# Altium PCB 34_14R.PcbDoc
Units mm, origin at the board's own origin, x right, y up, seen from the top; angles counter-clockwise.
Board outline 152.4 x 101.6 mm, 2 copper layers (Top Layer, Bottom Layer); 10 components, 25 nets, 70 pads, 4 vias.
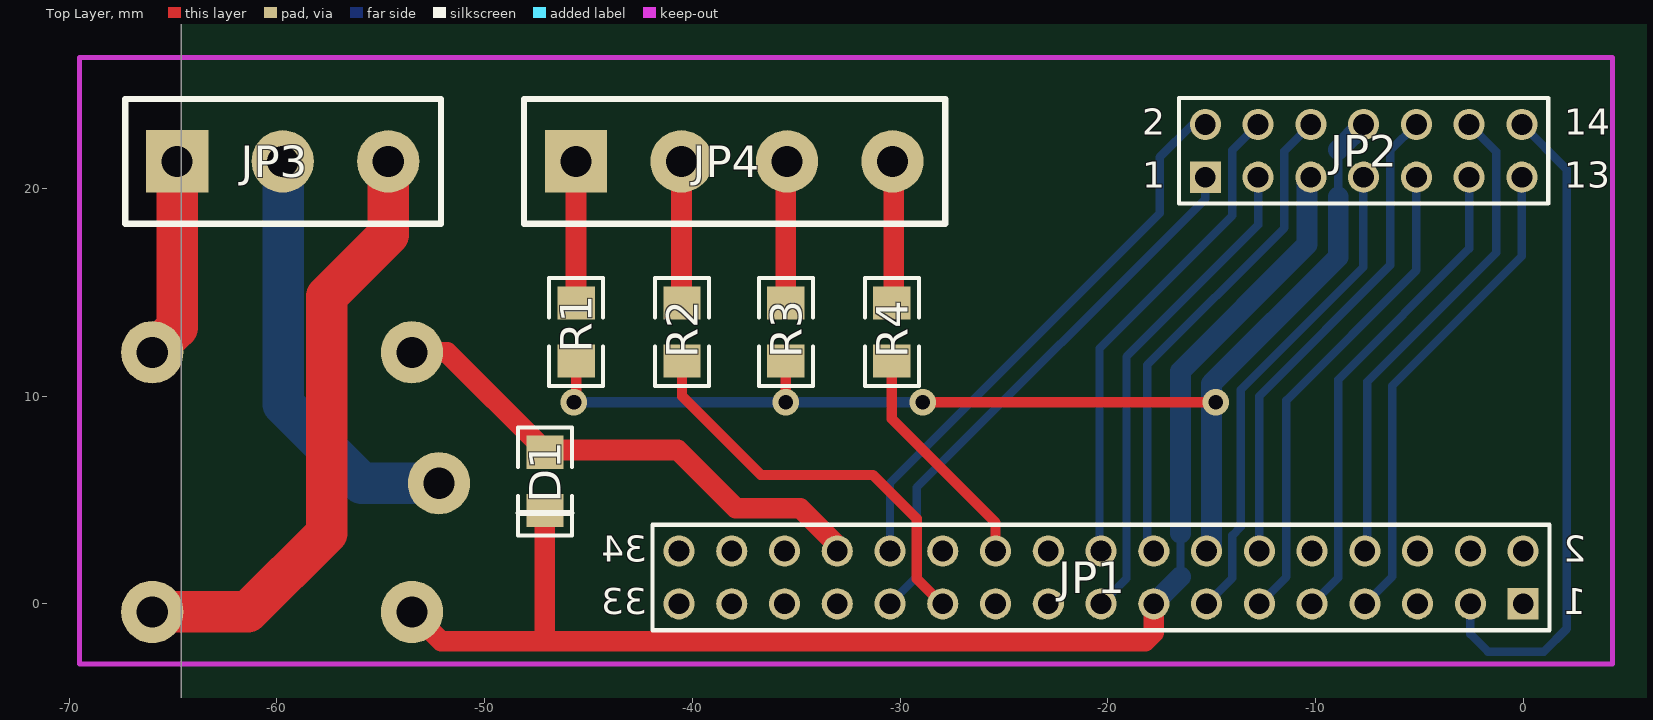
[diagram p0: Top Layer view]
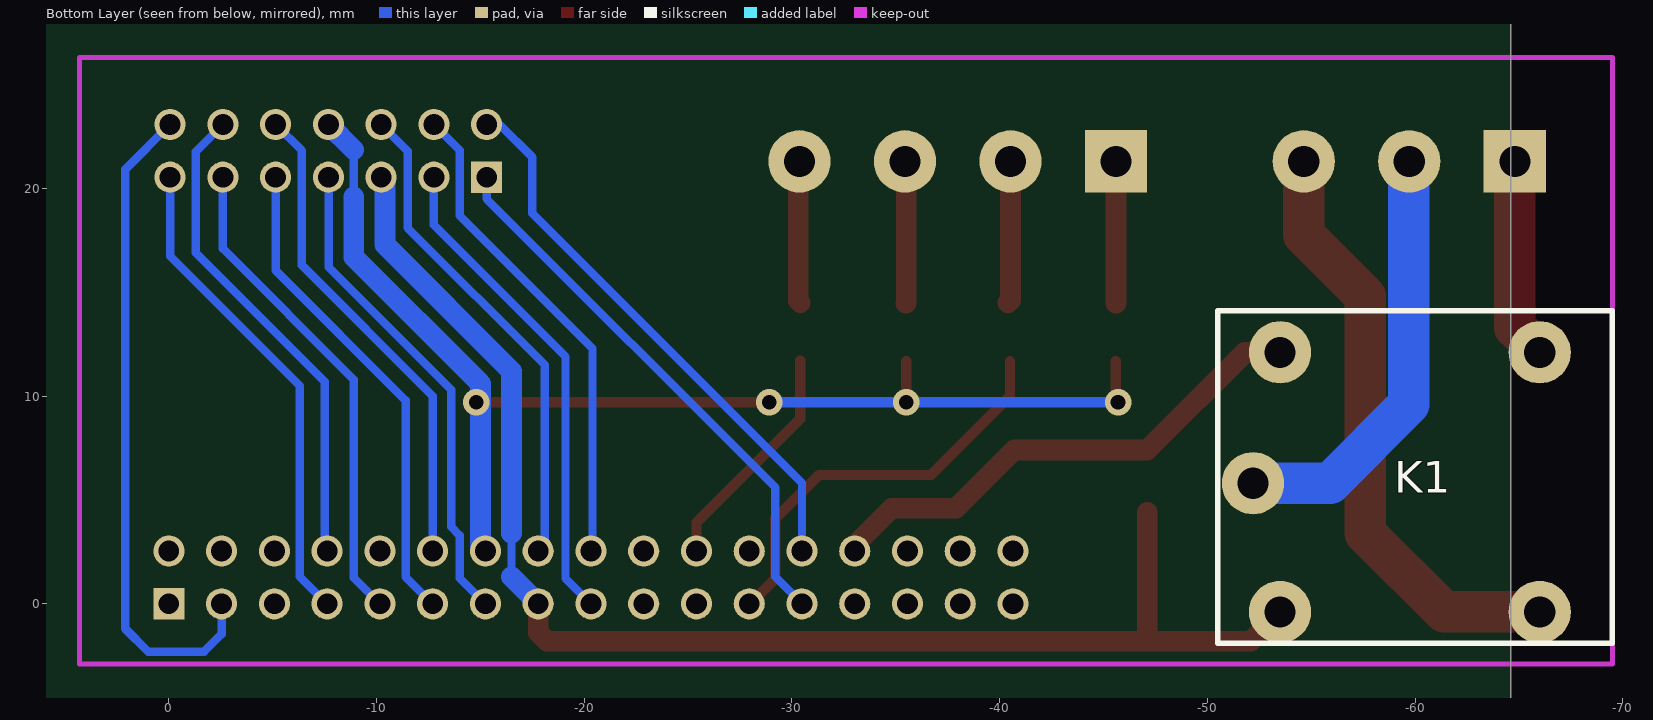
[diagram p1: Bottom Layer view, seen from below]

## Layer stack, top to bottom
Top Layer: signal copper 0.0356
Dielectric: dielectric 0.32, FR-4, Dk 4.8
Bottom Layer: signal copper 0.0356

## Board outline
-64.6,-29.6 87.8,-29.6 87.8,72 -64.6,72

## Design rules (kind name [scope] priority, off if disabled: settings)
Clearance [All] p1: gap=0.254
ComponentClearance [All] p1: gap=0.254 collisioncheckmode=0
PolygonConnect [All] p1: connectstyle=Relief reliefconductorwidth=0.254 reliefentries=4 polygonreliefangle="90 Angle"
RoutingLayers [All] p1: top layer=Horizontal bottom layer=Vertical
RoutingVias [All] p1: holewidth=0.711 width=1.27 viastyle="Through Hole" minholewidth=0.711 minwidth=1.27 maxholewidth=0.711 maxwidth=1.27
SolderMaskExpansion [All] p1: expansion=0.102
TestPointUsage [All] p1: valid=0 allowmultiple=FALSE
Testpoint [All] p1: side=15 testpointundercomponent=TRUE minsize=1.016 maxsize=2.54 preferedsize=1.524 minholesize=0 maxholesize=1.016 preferedholesize=0.813 testpointgrid=0.025 style=1023 order=1234567890
Width [All] p1: maxlimit=3 minlimit=0.254 preferedwidth=0.254 toplayer_prefwidth=0.5 bottomlayer_prefwidth=0.5 minimp=50.000000 maximp=50.000000 favimp=50.000000
16 further rules are at their usual default settings.

## Components (designator, comment, footprint, x,y, rotation, side; value= is the part's Value field where it differs from the comment)
D1 "LL4148" _1206d -47.1,5.9 r90 top
JP1 "MHDR2X17" HDR2X17 0,0 r180 top
JP2 "MHDR2X7" HDR2X7 -15.3,20.54 r0 top
JP3 "Header 3" 2EDG-5.08-3P -64.8,21.3 r0 top
JP4 "Header 4" "2EDG-5.08-4P - duplicate" -45.6,21.3 r0 top
K1 "BS115" bs115 -53.5,12.1 r270 bottom
R1 "K51" _1206 -45.6,13.1 r90 top
R2 "K51" _1206 -40.5,13.1 r90 top
R3 "K51" _1206 -35.5,13.1 r90 top
R4 "K51" _1206 -30.4,13.1 r90 top

## Footprints (in the part's own frame and the unit in brackets; to place one, negate y for a bottom-side part, rotate by r counter-clockwise, add the part's x,y. Pads: shape width x height; smd on the part's side, far side on the other; paste and mask are expansions set on the pad)
2EDG-5.08-3P [mm]
  rect 3x3 hole 1.5: 1(0,0)
  round 3 hole 1.5: 2(5.08,0) 3(10.16,0)
  silkscreen extent -2.5,-3 12.7,3
"2EDG-5.08-4P - duplicate" [mm]
  rect 3x3 hole 1.5: 1(0,0)
  round 3 hole 1.5: 2(5.08,0) 3(10.16,0) 4(15.24,0)
  silkscreen extent -2.5,-3 17.78,3
_1206 [mm]
  rect 1.6x1.8 smd: 1(-1.412,-0.007) 2(1.388,-0.007)
  silkscreen extent -2.61,-1.31 2.59,1.29
_1206d [mm]
  rect 1.6x1.8 smd: 1(1.395,-0.009) 2(-1.405,-0.009)
  silkscreen extent -2.6,-1.31 2.6,1.29
bs115 [mm]
  round 3 hole 1.5: 1(6.292,-1.304) 2(-0.008,12.496) 3(12.492,12.496) 4(-0.008,-0.004) 5(12.492,-0.004)
  silkscreen extent -2.01,-3 13.99,16
HDR2X7 [mm]
  rect 1.5x1.5 hole 1: 1(0,0)
  round 1.5 hole 1: 2(0,2.54) 3(2.54,0) 4(2.54,2.54) 5(5.08,0) 6(5.08,2.54) 7(7.62,0) 8(7.62,2.54) 9(10.16,0) 10(10.16,2.54) 11(12.7,0) 12(12.7,2.54) 13(15.24,0) 14(15.24,2.54)
  silkscreen extent -1.27,-1.27 16.51,3.81
HDR2X17 [mm]
  rect 1.5x1.5 hole 1: 1(0,0)
  round 1.5 hole 1: 2(0,-2.54) 3(2.54,0) 4(2.54,-2.54) 5(5.08,0) 6(5.08,-2.54) 7(7.62,0) 8(7.62,-2.54) 9(10.16,0) 10(10.16,-2.54) 11(12.7,0) 12(12.7,-2.54) 13(15.24,0) 14(15.24,-2.54) 15(17.78,0) 16(17.78,-2.54) 17(20.32,0) 18(20.32,-2.54) 19(22.86,0) 20(22.86,-2.54) 21(25.4,0) 22(25.4,-2.54) 23(27.94,0) 24(27.94,-2.54) 25(30.48,0) 26(30.48,-2.54) 27(33.02,0) 28(33.02,-2.54) 29(35.56,0) 30(35.56,-2.54) 31(38.1,0) 32(38.1,-2.54) 33(40.64,0) 34(40.64,-2.54)
  silkscreen extent -1.27,-3.81 41.91,1.27

## Part data
D1: library part Diode, "Diode"
JP1: "Header, 17-Pin, Dual row"
JP2: "Header, 7-Pin, Dual row"
JP3: library part MHDR1X2, "Header, 2-Pin"
JP4: "Header, 4-Pin"
K1: "Single-Pole Dual-Throw Relay"
R1 R2 R3 R4: library part Res2, "Resistor"

## Via types
v1: diameter 1.27, hole 0.711, Top Layer to Bottom Layer, 4 vias

## Nets (pads, with @x,y where several pads share a name; then routed paths per layer and width w, separated by ;. In a path a pad name is that pad's centre, name@x,y a point inside that pad or via, vN(x,y) a via of type N, cw(c..) or ccw(c..) an arc to the next point about the centre after c; other vN are vias at no path point)
NetD1_1: D1.1 JP1.28 K1.4 | length 24.6
  Top Layer w1: K1.4 -51.808,12.108 -47.2,7.5 -47.1,7.4 -40.7,7.4 -37.9,4.6 -34.8,4.6 -33.02,2.82 JP1.28
NetD1_2: D1.2 JP1.15 JP2.5 K1.5 | length 67.8
  Top Layer w1: K1.5 -52.088,-1.8 -18.2,-1.8 -17.78,-1.38 JP1.15 ; -47.1,-1.8 D1.2@-47.1,4.4
  Bottom Layer w0.4: JP1.15@-17.8,0 JP1.15@-17.79,0.01 ; -16.5,1.3 -16.5,3.4
  Bottom Layer w1: JP1.15@-17.8,0 -16.5,1.3 ; JP1.15 JP1.15@-17.78,0.02 ; -16.5,3.4 -16.5,11.2 -10.4,17.3 -10.4,20.36 JP2.5
NetJP1_3: JP1.3 JP2.14 | length 32.1
  Bottom Layer w0.4: JP1.3 -2.54,-1.46 -1.7,-2.3 1,-2.3 2.1,-1.2 2.1,20.92 JP2.14
NetJP1_7: JP1.7 JP2.13 | length 23.7
  Bottom Layer w0.4: JP1.7 -6.3,1.32 -6.3,10.5 -0.06,16.74 JP2.13
NetJP1_8: JP1.8 JP2.12 | length 23.7
  Bottom Layer w0.4: JP1.8@-7.6,2.5 -7.5,2.6 -7.5,10.7 -1.3,16.9 -1.3,21.78 JP2.12
NetJP1_9: JP1.9 JP2.11 | length 23.7
  Bottom Layer w0.4: JP1.9 -8.9,1.26 -8.9,10.8 -2.6,17.1 JP2.11
NetJP1_10: JP1.10
NetJP1_11: JP1.11 JP2.9 | length 23.7
  Bottom Layer w0.4: JP1.11 -11.4,1.3 -11.4,9.8 -5.14,16.06 JP2.9
NetJP1_12: JP1.12 JP2.10 | length 23.7
  Bottom Layer w0.4: JP1.12 -12.7,10 -6.4,16.3 -6.4,21.82 JP2.10
NetJP1_13: JP1.13 JP2.7 | length 23.7
  Bottom Layer w0.4: JP1.13 -14,1.24 -14,3.3 -13.6,3.7 -13.6,10.3 -7.7,16.2 JP2.7@-7.7,20.5 ; JP2.7@-7.68,20.5 JP2.7
NetJP1_14: JP1.14 JP2.8 R1.1 R3.1 | length 58.8
  Top Layer w0.5: v1(-45.7,9.7) -45.593,9.807 R1.1 ; v1(-35.5,9.7) -35.493,9.707 R3.1 ; v1(-28.9,9.7) v1(-14.8,9.7)
  Bottom Layer w0.4: -8.9,19.6 -8.9,21.86
  Bottom Layer w0.5: v1(-45.7,9.7) v1(-28.9,9.7)
  Bottom Layer w1: JP1.14 -15,2.78 -15,10.6 -8.9,16.7 -8.9,19.6 ; v1@-15,9.7 v1(-14.8,9.7) ; -8.9,21.86 JP2.8
NetJP1_16: JP1.16 JP2.6 | length 23.9
  Bottom Layer w0.4: JP1.16 -18.1,2.86 -18.1,11.5 -11.5,18.1 -11.5,21.8 JP2.6
NetJP1_17: JP1.17 JP2.3 | length 23.8
  Bottom Layer w0.4: JP1.17@-20.4,0 JP1.17 -19.1,1.22 -19.1,11.9 -12.76,18.24 JP2.3
NetJP1_18: JP1.18 JP2.4 | length 23.7
  Bottom Layer w0.4: JP1.18@-20.4,2.5 -20.4,12.3 -14,18.7 -14,21.84 JP2.4
NetJP1_22: JP1.22 R4.1 | length 11.2
  Top Layer w0.5: R4.1@-30.4,11.7 -30.4,8.9 -25.4,3.9 JP1.22
NetJP1_23: JP1.23 R2.1 | length 20
  Top Layer w0.5: R2.1 -40.493,9.993 -36.704,6.204 -31.304,6.204 -29.2,4.1 -29.2,1.2 JP1.23@-28,0
NetJP1_25: JP1.25 JP2.1 | length 26.8
  Bottom Layer w0.4: JP1.25@-30.5,0 -29.2,1.3 -29.2,5.6 -15.3,19.5 JP2.1
NetJP1_26: JP1.26 JP2.2 | length 27.2
  Bottom Layer w0.4: JP1.26 -30.48,5.82 -17.5,18.8 -17.5,21.5 -15.92,23.08 JP2.2 JP2.2@-15.3,23.1
NetJP3_1: JP3.1 K1.2 | length 9.8
  Top Layer w2: K1.2 -64.8,13.304 JP3.1@-64.8,21.4
NetJP3_2: JP3.2 K1.1 | length 20.7
  Bottom Layer w2: JP3.2@-59.7,21.2 -59.7,9.6 -55.908,5.808 K1.1
NetJP3_3: JP3.3 K1.3 | length 29.1
  Top Layer w2: K1.3 -61.392,-0.392 -57.6,3.4 -57.6,14.8 -54.64,17.76 JP3.3
NetJP4_1: JP4.1 R1.2 | length 6.8
  Top Layer w1: JP4.1 -45.6,14.494 R1.2
NetJP4_2: JP4.2 R2.2 | length 6.8
  Top Layer w1: JP4.2 -40.52,14.62 -40.441,14.541 R2.2@-40.4,14.5
NetJP4_3: JP4.3 R3.2 | length 6.8
  Top Layer w1: JP4.3@-35.5,21.3 -35.5,14.494 R3.2
NetJP4_4: JP4.4 R4.2 | length 6.8
  Top Layer w1: R4.2@-30.4,14.5 -30.3,14.6 JP4.4@-30.3,21.3
pads on no net: JP1.1 JP1.2 JP1.4 JP1.5 JP1.6 JP1.19 JP1.20 JP1.21 JP1.24 JP1.27 JP1.29 JP1.30 JP1.31 JP1.32 JP1.33 JP1.34

## Keep-outs
Keep-Out Layer:
  lines w0.25: -69.5,-2.9 4.3,-2.9 4.3,26.3 -69.5,26.3 -69.5,-2.8

## Silkscreen, mask and mechanical layers (free items; w line width, h text height)
Mechanical 1:
  lines w0.25: -85,-4 37.4,-4 ; -85,16 36.4,16 ; -85,17.5 38.4,17.5 ; -80.9,-4 -80.9,16 ; -77.91,-9.99 -77.91,25 ; -74.9,-4 -74.9,16 ; -40.7,-2.54 -40.7,6.107 -40.626,6.181 ; 21.1,-4 21.1,16 ; 24.09,-9.99 24.09,25.031 ; 26,-4 26,-3.6 ; 27.1,-4 27.1,16

## Dimensions
-85,17.5 to -69.5,26.3 on Mechanical 1
-69.5,26.3 to 4.3,26.3 on Mechanical 1
37.4,-4 to 36.4,16 on Mechanical 1
4.3,-2.9 to 4.3,26.3 on Mechanical 1
-77.91,-9.99 to 0,0 on Mechanical 1
-77.91,-9.99 to -40.64,0 on Mechanical 1
-77.91,-9.99 to 24.09,-9.99 on Mechanical 1

## Text inside footprints (layer, text, board x,y; h text height)
JP1: Top Overlay "2" at 3.048,2.032 h1.27; Top Overlay "1" at 3.048,-0.508 h1.27; Top Overlay "33" at -42.164,-0.508 h1.27; Top Overlay "34" at -42.164,2.032 h1.27
JP2: Top Overlay "13" at 1.972,20.032 h1.27; Top Overlay "14" at 1.972,22.572 h1.27; Top Overlay "1" at -18.348,20.032 h1.27; Top Overlay "2" at -18.348,22.572 h1.27